# EAGLE board motorshieldv10_jd (EAGLE 5.06)
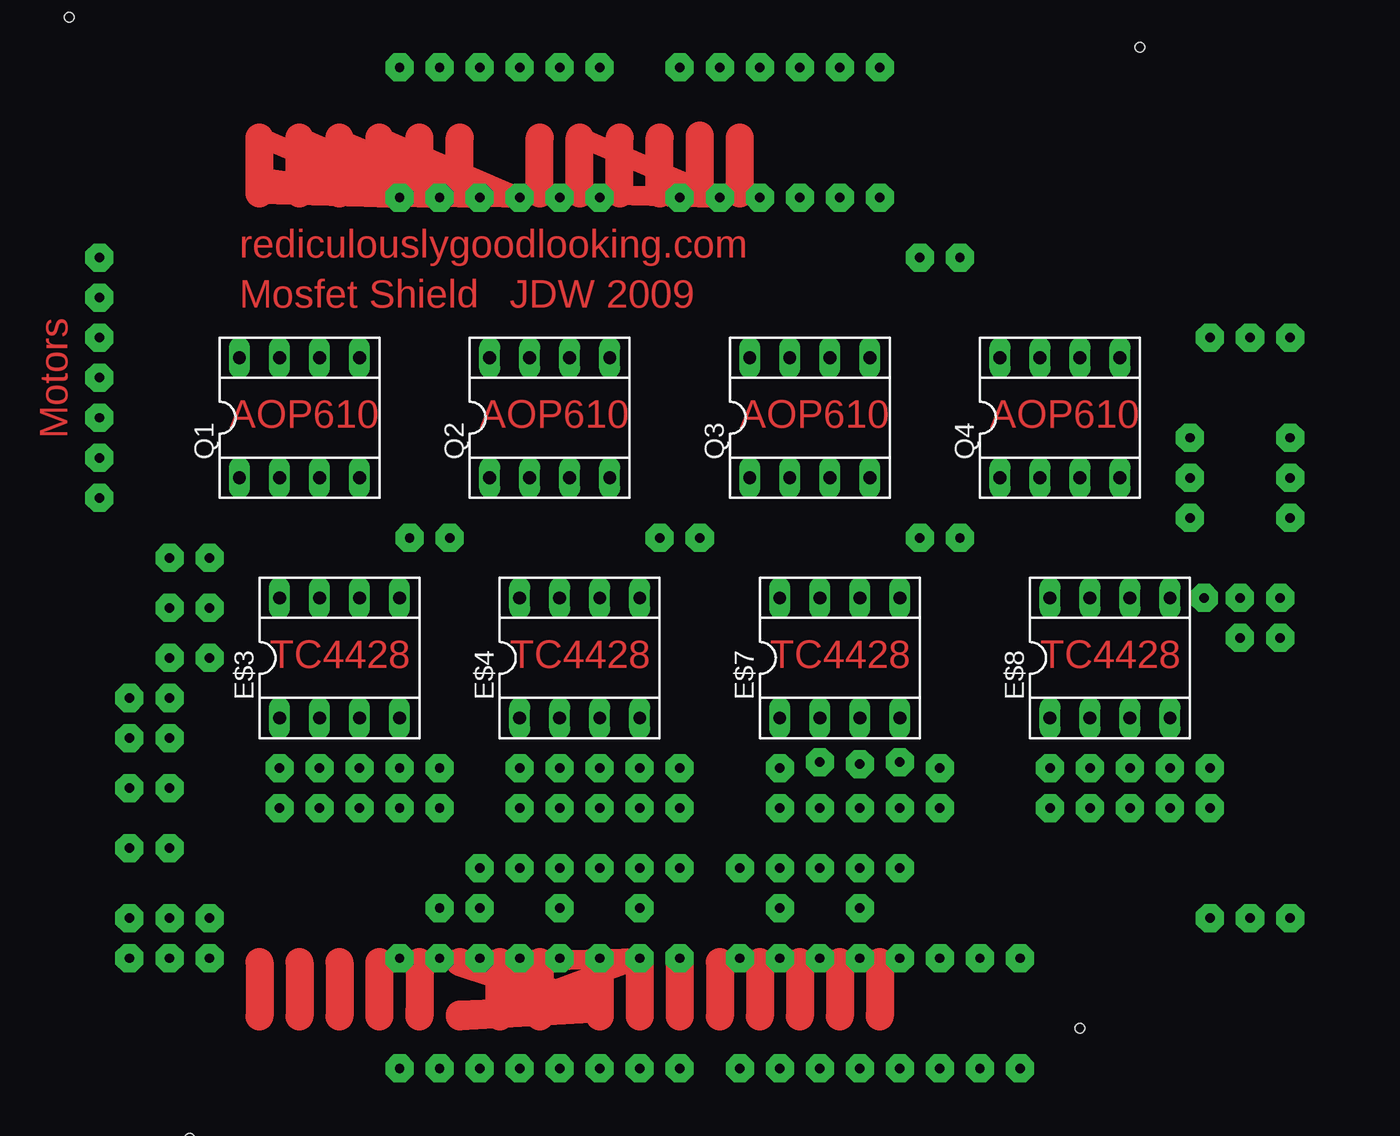
[diagram p0: board, top side]
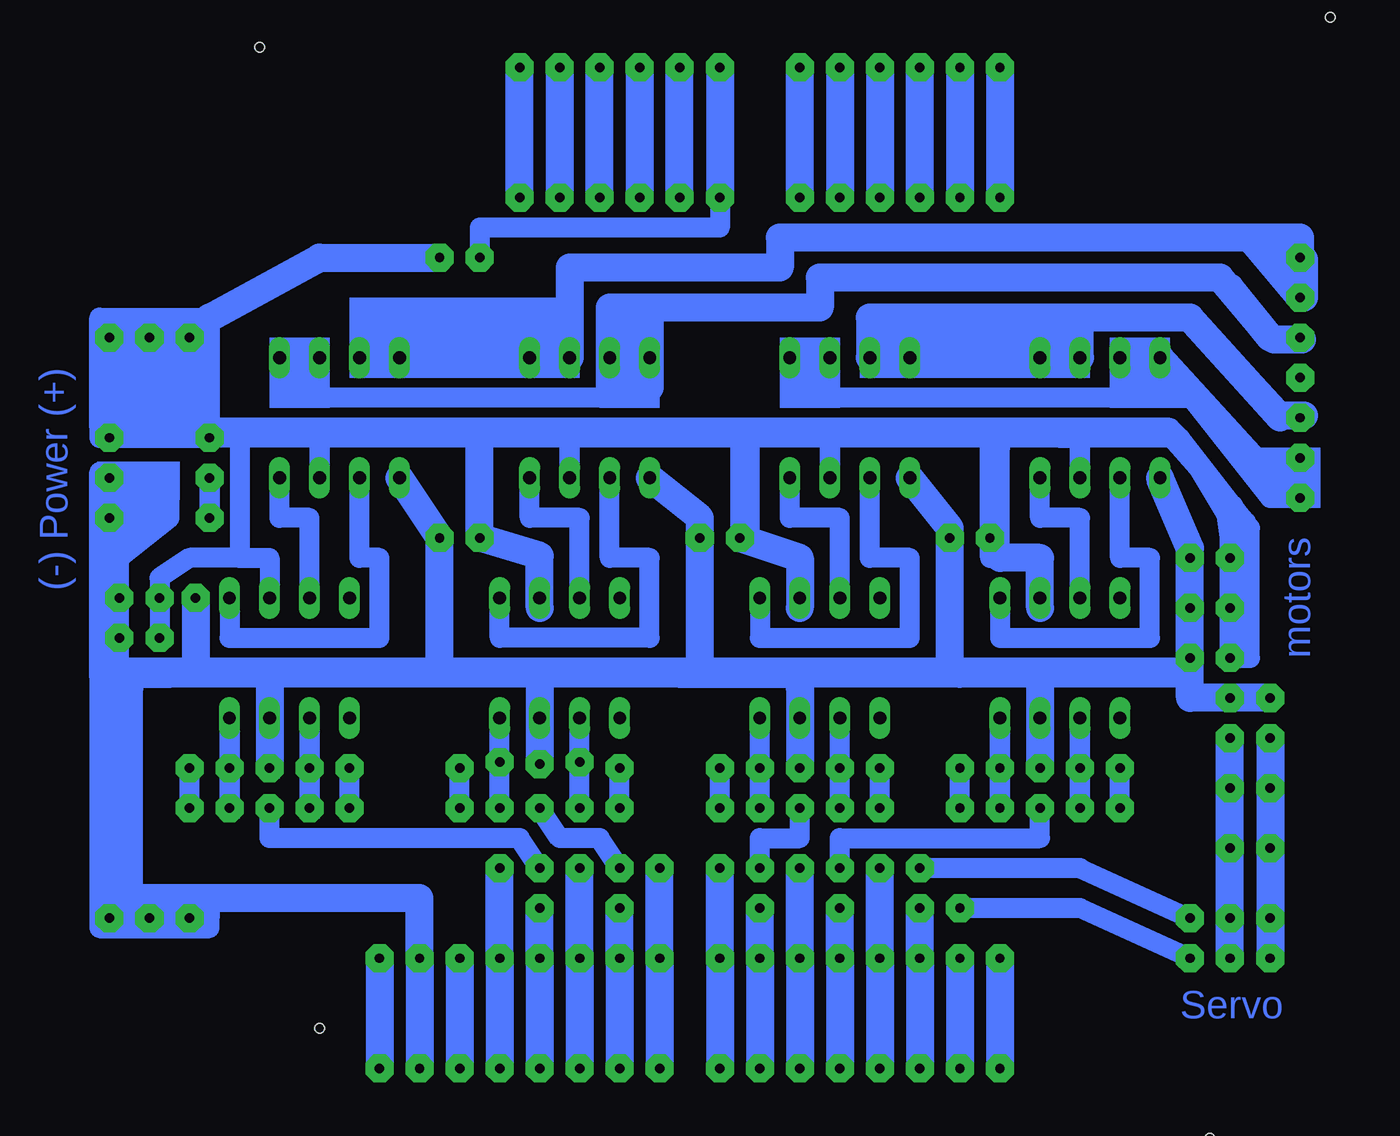
[diagram p1: board, bottom side, seen from below]

No outline drawn. Coordinates in mm, seen from the top.
Copper layers (1*16): Top 0.035mm / dielectric 1.5mm / Bottom 0.035mm
Design rules "default": minimum track width 10mil, minimum drill 24mil, track to track 8mil, track to pad 8mil, pad to pad 8mil, via to via 8mil, smd to smd 8mil, copper to edge 40mil, drill to drill 8mil, minimum pad ring 10mil, minimum via ring 8mil, stop-mask expansion 4mil, vias tented up to drill 0mil, thermal gap 10mil
Holes 0.6 mm at -1.91,59.05 5.71,-12.06 62.23,-5.08 66.04,57.15 -36.2,-14.61

## Footprints (pad centres in the part's own frame; a part is rotated, then mirrored left to right if it is on the bottom)
SOCKET-08 = drill 0.813 long: 1 -3.81,-3.81; 2 -1.27,-3.81; 3 1.27,-3.81; 4 3.81,-3.81; 5 3.81,3.81; 6 1.27,3.81; 7 -1.27,3.81; 8 -3.81,3.81

## Placement (x,y rotation side)
E$3  TC4427  [SOCKET-08]  15.24,18.41 0 top
E$4  TC4427  [SOCKET-08]  30.48,18.41 0 top
E$7  TC4427  [SOCKET-08]  46.99,18.41 0 top
E$8  TC4427  [SOCKET-08]  64.14,18.41 0 top
Q1  AOP610  [SOCKET-08]  12.7,33.66 0 top
Q2  AOP610  [SOCKET-08]  28.57,33.66 0 top
Q3  AOP610  [SOCKET-08]  45.09,33.66 0 top
Q4  AOP610  [SOCKET-08]  60.96,33.66 0 top

## Library data of the parts
E$3 E$4 E$7 E$8 Q1-Q4 = ic-package

## Nets
GND: E$3.3 E$4.3 E$7.3 E$8.3 Q1.1 Q2.1 Q3.1 Q4.1
S$1: E$3.5 Q1.2
S$3: E$3.7 Q1.4
S$6: E$4.7 Q2.4
S$7: E$4.5 Q2.2
S$15: E$3.4
S$18: E$7.5 Q3.2
S$22: E$7.7 Q3.4
S$23: E$8.7 Q4.4
S$28: E$8.5 Q4.2
S$29: E$4.2
S$31: E$4.4
S$32: E$7.2
S$34: E$7.4
S$35: E$8.2
S$41: E$8.4
S$49: Q3.6
S$59: Q1.8
S$63: Q1.3 Q2.3 Q3.3
S$72: E$7.6
VCC: Q4.3

## Tracks (layer width: path | path; a pad name or v marks a point on that pad's centre or on a via)
GND  (via drill 0.6 pad 1.78)
  Bottom 0.406: 48.26,12.06 E$7.3 48.26,17.14 | v31.75,11.43 E$4.3 31.75,16.51 | v65.41,11.43 E$8.3 65.41,17.14 | 22.23,26.67 22.23,27.3 | v16.51,11.43 E$3.3 16.51,17.14
  Bottom 0.813: v48.26,11.68 48.26,12.06 48.26,11.43 | 48.26,16.51 48.26,17.14 54.61,17.78 65.41,17.14 71.75,17.14 | 38.1,17.78 39.37,17.14 | 31.75,17.14 31.75,16.51
  Bottom 1.27: 70.48,2.54 v70.48,1.91 69.22,1.27 | 73.66,1.91 71.75,2.54 71.75,3.17 | v73.03,1.91 72.39,1.27 75.56,1.27 74.93,16.51 74.3,16.51 | 69.22,1.91 69.22,2.54 | 69.22,1.27 69.22,1.91 | 69.22,3.17 69.22,1.91 | 71.75,3.17 71.75,1.91 | 71.75,3.17 71.12,3.17 | 75.56,24.51 75.31,26.54 76.2,26.29 | 69.22,1.27 76.2,1.27 76.2,4.45 | 76.2,4.45 76.2,1.91 v75.56,1.91 75.56,3.17 75.56,17.14 | 76.2,26.29 76.2,26.67 | 76.2,26.29 76.2,30.23 | 74.3,3.17 74.3,1.91 | 76.2,17.78 76.2,26.29 | 76.2,17.78 76.2,4.45 | 76.2,17.78 76.2,17.14 75.56,17.14 | 71.75,29.84 71.75,27.3 74.93,24.77 v74.93,22.23 v74.93,19.68 74.93,17.78 | 75.56,17.14 76.2,17.78 | 71.75,17.14 75.56,17.14 | 71.75,17.14 48.26,17.14 39.37,17.14 31.75,17.14 21.59,17.14 | 71.75,17.14 74.93,17.14 74.93,17.78 | 22.23,17.78 21.59,17.14 | 21.59,17.14 16.51,17.14 6.99,17.14 6.99,15.88 6.99,17.78 | Q1.1 6.99,26.04 6.99,25.4 | 6.99,17.78 v6.99,18.41 v6.99,21.59 v6.99,24.77 | 6.99,17.78 22.23,17.78 | 22.23,17.78 38.1,17.78 54.61,17.78 74.93,17.78
  Bottom 1.778: 69.22,3.17 71.75,3.17 74.3,3.17 | 74.3,3.17 74.3,16.51 | Q4.1 v54.61,26.04 54.61,17.78 | Q3.1 38.1,27.3 v38.1,26.04 38.1,17.78 | 48.26,17.14 48.26,12.06 | 75.56,3.17 74.3,3.17 | 65.41,17.14 v65.41,11.43 | 31.75,16.51 v31.75,11.43 | Q2.1 22.23,26.67 v22.23,26.04 22.23,17.78 | 16.51,17.14 v16.51,11.43 | Q1.1 6.99,25.4 v6.99,24.77 v6.99,21.59 v6.99,18.41 6.99,15.88 v4.45,15.88 v1.91,15.88
S$1
  Bottom 1.27: E$3.5 19.05,19.68 9.53,19.68 9.53,24.77 11.43,24.77 Q1.2
S$2  (via drill 0.6 pad 1.78)
  other vias: 6.99,1.91
S$3
  Bottom 1.27: E$3.7 13.97,27.3 16.51,27.3 Q1.4
S$4  (via drill 0.6 pad 1.78)
  Bottom 1.778: v43.18,2.54 v43.18,-0.64 v43.18,-7.62
S$5  (via drill 0.6 pad 1.78)
  Bottom 1.27: v21.59,2.54 13.97,2.54 v6.99,-0.64
S$6
  Bottom 1.27: Q2.4 32.38,27.3 29.21,27.3 E$4.7
S$7
  Bottom 1.27: E$4.5 34.29,19.68 24.77,19.68 24.77,24.77 27.3,24.77 Q2.2
S$8  (via drill 0.6 pad 1.78)
  Bottom 1.778: v29.21,2.54 v29.21,-0.64 v29.21,-7.62
S$9  (via drill 0.6 pad 1.78)
  Bottom 1.778: v26.67,5.08 v26.67,-0.64 v26.67,-7.62
S$10  (via drill 0.6 pad 1.78)
  Bottom 1.778: v48.26,2.54 v48.26,-0.64 v48.26,-7.62
S$11  (via drill 0.6 pad 1.78)
  other vias: 73.03,38.73
S$12  (via drill 0.6 pad 1.78)
  Bottom 0.61: v48.26,5.08 48.26,5.21
  Bottom 1.27: v48.26,5.08 49.53,6.99 65.41,6.99 v65.41,8.89
S$13  (via drill 0.6 pad 1.78)
  other vias: 13.97,8.89
S$14  (via drill 0.6 pad 1.78)
  Bottom 1.27: v29.21,5.08 29.21,6.99 16.51,6.99 v16.51,8.89
S$15  (via drill 0.6 pad 1.78)
  Bottom 0.406: v19.05,8.89 v19.05,11.43 E$3.4
  Bottom 1.27: v19.05,8.89 v19.05,11.43 19.05,15.24
S$16
  Bottom 1.27: 42.55,34.92 62.87,34.92
S$17  (via drill 0.6 pad 1.78)
  other vias: 4.45,21.59
S$18
  Bottom 1.27: E$7.5 50.8,19.68 41.27,19.68 41.27,24.77 43.81,24.77 Q3.2
S$19
  Bottom 1.27: 11.43,34.92 30.48,34.92
S$20  (via drill 0.6 pad 1.78)
  Bottom 1.27: v24.13,5.08 13.97,5.08 6.99,1.91
S$21  (via drill 0.6 pad 1.78)
  other vias: 0,36.2
S$22
  Bottom 0.406: Q3.4 48.9,27.94
  Bottom 1.27: E$7.7 45.72,27.3 48.9,27.3 Q3.4
S$23
  Bottom 0.406: Q4.4 64.77,27.94
  Bottom 1.27: E$8.7 62.87,27.3 64.77,27.3 Q4.4
S$24  (via drill 0.6 pad 1.78)
  Bottom 0.813: 1.27,33.66 v0,33.66
  Bottom 1.27: 6.99,40.01 13.34,40.01
  Bottom 1.778: 1.27,33.66 6.99,40.01 27.3,40.01 27.3,37.47 13.97,37.47 13.97,39.37
S$25  (via drill 0.6 pad 1.78)
  Bottom 1.778: v4.45,-0.64 v4.45,13.34
S$26  (via drill 0.6 pad 1.78)
  Bottom 1.778: v44.45,47.62 v44.45,55.88
S$27  (via drill 0.6 pad 1.78)
  Top 1.27: v19.05,47.62 10.16,48.9 | v19.05,47.62 10.16,47.88 10.16,47.62 | v19.05,47.62 10.16,51.44
  Top 1.778: 10.16,47.88 10.16,51.44
  Bottom 1.778: v19.05,55.88 v19.05,47.62
S$28
  Bottom 1.27: E$8.5 67.94,19.68 58.42,19.68 58.42,24.77 59.69,24.77 Q4.2
S$29  (via drill 0.6 pad 1.78)
  Bottom 0.406: v29.21,8.89 v29.21,11.43 E$4.2
  Bottom 1.27: v29.21,8.89 v29.21,11.43 29.21,15.24
S$30  (via drill 0.6 pad 1.78)
  Bottom 1.778: v21.59,-0.64 v21.59,-7.62
S$31  (via drill 0.6 pad 1.78)
  Bottom 0.406: v34.29,8.89 v34.29,11.43 E$4.4
  Bottom 1.27: v34.29,8.89 v34.29,11.43 34.29,15.24
S$32  (via drill 0.6 pad 1.78)
  Bottom 0.406: v45.72,8.89 v45.72,11.81
  Bottom 0.813: v45.72,11.81 E$7.2
  Bottom 1.27: v45.72,8.89 v45.72,11.81 45.72,15.24
S$33  (via drill 0.6 pad 1.78)
  Bottom 1.778: v24.13,2.54 v24.13,-0.64 v24.13,-7.62
S$34  (via drill 0.6 pad 1.78)
  Bottom 0.406: v50.8,8.89 v50.8,11.81
  Bottom 0.813: v50.8,8.89 v50.8,11.81 E$7.4
  Bottom 1.27: v50.8,8.89 v50.8,11.81 50.8,15.24
S$35  (via drill 0.6 pad 1.78)
  Bottom 0.813: v62.87,8.89 v62.87,11.43 E$8.2
S$36  (via drill 0.6 pad 1.78)
  Bottom 1.778: v19.05,-0.64 v19.05,-7.62
S$37  (via drill 0.6 pad 1.78)
  Bottom 0.813: v69.22,27.3 v69.22,29.84
S$38  (via drill 0.6 pad 1.78)
  Bottom 1.778: v31.75,47.62 v31.75,55.88
S$39  (via drill 0.6 pad 1.78)
  other vias: 4.45,1.91
S$40
  Bottom 1.778: -0.25,41.27 -0.25,43.69
S$41  (via drill 0.6 pad 1.78)
  Bottom 0.813: v67.94,8.89 v67.94,11.43 E$8.4
S$42  (via drill 0.6 pad 1.78)
  Bottom 1.778: v70.1,22.23 70.1,18.29
S$43  (via drill 0.6 pad 1.78)
  Bottom 0.813: v0,38.73 1.91,38.73
  Bottom 1.778: 4.45,41.91 1.91,38.73 5.08,42.55 30.48,42.55 30.48,40.64 41.27,40.64 | 41.27,40.64 43.81,40.64 43.81,38.73 | 43.81,38.73 43.81,37.47 | 43.81,37.47 43.81,36.2 41.27,36.2 41.27,39.37 42.55,39.37 | 43.81,37.47 43.18,36.83 | 43.81,38.73 43.81,35.56 | 41.27,40.64 41.27,35.56
S$44  (via drill 0.6 pad 1.78)
  Bottom 1.27: 19.68,31.75 v19.68,26.04 19.68,24.77 19.05,24.77 19.05,31.75
  Bottom 1.778: 19.05,24.77 16.51,24.77 16.51,21.59
S$45
  Bottom 1.778: 3.81,23.5 4.45,27.94
S$46  (via drill 0.6 pad 1.78)
  other vias: 4.45,24.77
S$47  (via drill 0.6 pad 1.78)
  other vias: 75.56,38.73
S$48  (via drill 0.6 pad 1.78)
  other vias: 0,28.57
S$49  (via drill 0.6 pad 1.78)
  Bottom 0.406: 46.35,38.1 46.35,38.73
  Bottom 0.813: Q3.6 46.35,38.1
  Bottom 1.27: 46.35,36.83 Q3.6 46.35,38.73
  Bottom 1.778: Q3.6 46.35,43.18 33.02,43.18 33.02,45.09 3.17,45.09 | v0,41.27 v0,43.81 | v0,41.27 0,45.09 3.17,45.09 | 3.17,45.09 v0,41.27 | v0,41.27 1.27,43.81
S$50  (via drill 0.6 pad 1.78)
  Top 1.27: 30.48,51.44 v39.37,47.62 30.48,47.88 30.48,47.62
  Top 1.778: 30.48,47.88 30.48,51.44
  Bottom 1.778: v39.37,47.62 v39.37,55.88
S$51  (via drill 0.6 pad 1.78)
  other vias: 4.45,10.16
S$53  (via drill 0.6 pad 1.78)
  Bottom 1.778: v58.42,-0.64 v58.42,-7.62
S$54  (via drill 0.6 pad 1.78)
  other vias: 1.91,1.91
S$55  (via drill 0.6 pad 1.78)
  Top 1.27: v24.13,47.62 15.24,48.9 | v24.13,47.62 15.24,47.88 15.24,47.62 | v24.13,47.62 15.24,51.31
  Top 1.778: 15.24,47.88 15.24,51.31 15.24,51.44
  Bottom 1.778: v24.13,47.62 v24.13,55.88
S$56  (via drill 0.6 pad 1.78)
  other vias: 1.91,6.35
S$57  (via drill 0.6 pad 1.78)
  other vias: 4.45,6.35
S$58  (via drill 0.6 pad 1.78)
  Bottom 1.778: v53.34,-0.64 v53.34,-7.62
S$59
  Bottom 1.27: 1.91,29.84 2.54,31.11 1.27,31.11 1.27,28.57 Q1.8 1.91,28.57
  Bottom 1.778: 2.54,30.48 Q1.8
S$60  (via drill 0.6 pad 1.78)
  Top 1.27: 25.4,-4.45 25.4,-4.32 25.4,-4.19 | 25.4,-0.64 25.4,-0.89 v34.29,-0.64 | 25.4,-3.94 v34.29,-0.64 | 34.29,-1.91 v34.29,-0.64 | 34.29,-4.32 34.29,-4.45
  Top 1.778: 25.4,-3.94 25.4,-0.89 | 25.4,-3.94 25.4,-4.19 | 25.4,-3.94 25.4,-4.32 | 34.29,-0.89 v34.29,-0.64 34.29,-4.32
  Bottom 1.778: v34.29,2.54 v34.29,-0.64 v34.29,-7.62
S$61  (via drill 0.6 pad 1.78)
  other vias: 1.91,10.16
S$62  (via drill 0.6 pad 1.78)
  Bottom 1.778: v49.53,47.62 v49.53,55.88
S$63  (via drill 0.6 pad 1.78)
  Bottom 0.813: 46.35,32.38 52.07,32.38 | 46.35,32.38 Q3.3 | Q2.3 29.84,32.38 35.56,32.38 46.35,32.38 | 13.97,32.38 Q1.3 | 19.68,32.38 19.05,32.38 15.24,32.38
  Bottom 1.27: 69.22,40.01 76.2,40.01 76.2,39.37 | v72.39,19.68 v72.39,22.23 72.39,23.5 70.48,24.77 67.31,24.77 | 65.41,21.59 65.41,24.77 67.31,24.77 | 67.31,32.38 67.31,24.77 | 67.31,32.38 v69.22,32.38 v75.56,32.38 76.2,32.38 76.2,33.02 | 13.97,29.21 13.97,32.38 15.24,32.38 | 35.56,32.38 v35.56,26.04 | 35.56,32.38 67.31,32.38 | 19.05,32.38 35.56,32.38 | 76.2,33.02 8.26,33.02 7.62,32.38 | 15.24,32.38 35.56,32.38 | 7.62,32.38 15.24,32.38 | 7.62,32.38 3.81,26.04 | 7.62,32.38 3.17,26.67 3.17,18.41 v4.45,18.41 | 69.22,39.37 v70.48,38.73 | 69.22,39.37 69.22,33.66 | 76.2,39.37 69.22,39.37 | 76.2,33.02 76.2,39.37
  Bottom 1.778: v54.61,43.81 62.23,43.81 69.22,40.01 | 31.75,21.59 31.75,24.77 v35.56,26.04
S$64  (via drill 0.6 pad 1.78)
  Top 1.27: v21.59,47.62 12.7,48.9 | v21.59,47.62 12.7,47.88 12.7,47.62 | v21.59,47.62 12.7,51.44
  Top 1.778: 12.7,47.88 12.7,51.44
  Bottom 1.778: v21.59,55.88 v21.59,47.62
S$65  (via drill 0.6 pad 1.78)
  Bottom 1.778: v1.91,13.34 v1.91,-0.64
S$66  (via drill 0.6 pad 1.78)
  other vias: 0,31.11
S$67  (via drill 0.6 pad 1.78)
  Top 1.27: 17.78,47.62 17.78,47.88 v26.67,47.62 17.78,51.44
  Top 1.778: 17.78,47.88 17.78,51.44
  Bottom 1.778: v26.67,55.88 v26.67,47.62
S$68  (via drill 0.6 pad 1.78)
  Bottom 1.778: v29.21,55.88 v29.21,47.62
S$70  (via drill 0.6 pad 1.78)
  Bottom 1.27: v21.59,8.89 v21.59,11.43
S$72
  Bottom 0.813: E$7.6 48.26,24.77
S$73
  Bottom 0.406: 41.78,37.08 41.66,37.08
S$74  (via drill 0.6 pad 1.78)
  Bottom 1.27: v36.83,47.62 36.83,45.72 52.07,45.72 v52.07,43.81
  Bottom 1.778: v36.83,55.88 v36.83,47.62
S$76  (via drill 0.6 pad 1.78)
  Bottom 1.778: v41.91,55.88 v41.91,47.62
S$81
  Bottom 1.27: 1.65,38.61 4.57,41.91
  Bottom 1.778: -0.13,38.61 1.65,38.61
S$82
  Bottom 1.27: 1.02,33.78 6.6,39.88
  Bottom 1.778: -0.25,33.78 1.02,33.78
S$83  (via drill 0.6 pad 1.78)
  Bottom 1.778: v46.99,55.88 v46.99,47.62
S$85  (via drill 0.6 pad 1.78)
  Bottom 1.27: v11.43,8.89 v11.43,11.43
S$86  (via drill 0.6 pad 1.78)
  Bottom 1.27: v26.67,8.89 v26.67,11.43
S$87  (via drill 0.6 pad 1.78)
  Bottom 1.778: 48.26,21.59 48.26,24.89 v52.07,26.04 52.07,32.26
S$88  (via drill 0.6 pad 1.78)
  Bottom 1.27: v36.83,8.89 36.83,11.43
S$91  (via drill 0.6 pad 1.78)
  Bottom 1.27: v43.18,8.89 v43.18,11.43
S$93  (via drill 0.6 pad 1.78)
  Bottom 1.27: v53.34,8.89 v53.34,11.43
S$95  (via drill 0.6 pad 1.78)
  Bottom 1.27: v60.33,8.89 v60.33,11.43
S$97  (via drill 0.6 pad 1.78)
  Bottom 1.27: v70.48,8.89 v70.48,11.43
S$103  (via drill 0.6 pad 1.78)
  Bottom 1.778: v50.8,5.08 v50.8,-0.64 v50.8,-7.62
S$106
  Bottom 1.27: 8,32.38 8.13,32.38 3.43,27.05
S$111
  Top 1.27: 20.32,48.9 20.32,48.26 | 20.32,48.26 20.32,47.88 20.32,47.62 | 20.32,51.44 20.32,48.26
  Top 1.778: 20.32,47.88 20.32,51.44
S$112  (via drill 0.6 pad 1.78)
  Bottom 1.27: v34.29,5.08 34.29,6.99 31.75,6.99 v31.75,8.89
S$113  (via drill 0.6 pad 1.78)
  Bottom 0.813: v75.56,27.3 v75.56,29.84
  Bottom 1.27: 73.66,27.94 74.3,26.67 74.3,25.4 72.39,27.94 73.66,28.57 v75.56,27.3 | 74.3,27.3 v75.56,27.3 | v75.56,27.3 76.2,27.3 | 74.3,29.84 v75.56,29.84 76.2,29.84 76.2,27.3 | 74.93,25.4 76.2,27.3
S$114
  Top 1.27: 22.86,47.88 22.86,47.62
  Top 1.778: 22.86,47.88 22.86,51.44
S$115
  Top 1.27: 27.94,48.9 27.94,48.26 | 27.94,48.26 27.94,47.88 27.94,47.62 | 27.94,51.44 27.94,48.26
  Top 1.778: 27.94,47.88 27.94,51.44
S$116
  Top 1.27: 33.02,48.9 33.02,48.26 | 33.02,48.26 33.02,47.88 33.02,47.62 | 33.02,51.44 33.02,48.26
  Top 1.778: 33.02,47.88 33.02,51.44
S$117
  Top 1.27: 35.56,47.62 35.56,47.88
  Top 1.778: 35.56,47.88 35.56,51.44
S$118
  Top 1.27: 38.1,48.9 38.1,48.26 | 38.1,48.26 38.1,47.88 38.1,47.62 | 38.1,48.26 38.1,51.44
  Top 1.778: 38.1,47.88 38.1,51.56
S$119
  Top 1.27: 40.64,47.88 40.64,47.62
  Top 1.778: 40.64,47.88 40.64,51.44
S$120
  Top 1.27: 10.16,-0.64 10.16,-0.89 | 10.16,-4.32 10.16,-4.45
  Top 1.778: 10.16,-0.89 10.16,-4.32
S$121
  Top 1.27: 12.7,-0.64 12.7,-0.89 12.7,-1.27 | 12.7,-1.27 12.7,-1.91 | 12.7,-1.27 12.7,-4.32 12.7,-4.45
  Top 1.778: 12.7,-0.89 12.7,-4.32
S$122
  Top 1.27: 15.24,-0.64 15.24,-0.89 | 15.24,-4.32 15.24,-4.45
  Top 1.778: 15.24,-0.89 15.24,-4.32
S$123
  Top 1.27: 17.78,-0.64 17.78,-0.89 | 17.78,-4.32 17.78,-4.45
  Top 1.778: 17.78,-4.32 17.78,-0.89
S$124
  Top 1.27: 20.32,-0.64 20.32,-0.89 | 20.32,-4.19 20.32,-4.32 20.32,-4.45
  Top 1.778: 20.32,-0.89 20.32,-3.94 | 20.32,-3.94 20.32,-4.19 | 20.32,-3.94 20.32,-4.32
S$125  (via drill 0.6 pad 1.78)
  Bottom 1.778: 75.56,3.17 55.88,3.17 v55.88,-0.64 v55.88,-7.62
S$126
  Top 1.27: 27.94,-1.91 27.94,-1.27 | 27.94,-1.27 27.94,-1.02 | 27.94,-0.89 27.94,-0.64 | 27.94,-1.27 27.94,-3.94 | 27.94,-4.32 27.94,-4.45
  Top 1.778: 27.94,-1.02 27.94,-0.89 27.94,-3.94 27.94,-4.32
S$127  (via drill 0.6 pad 1.78)
  Top 1.27: 31.75,-4.32 31.75,-4.45
  Top 1.778: 31.75,-0.89 v31.75,-0.64 31.75,-4.32
  Bottom 1.778: v31.75,5.08 v31.75,-0.64 v31.75,-7.62
S$129  (via drill 0.6 pad 1.78)
  Top 1.27: 36.83,-1.91 v36.83,-0.64 | 36.83,-4.19 36.83,-4.32 36.83,-4.45
  Top 1.778: 36.83,-0.89 v36.83,-0.64 36.83,-4.06 | 36.83,-4.06 36.83,-4.19 | 36.83,-4.06 36.83,-4.32
  Bottom 1.778: v36.83,5.08 v36.83,-0.64 v36.83,-7.62
S$130
  Top 1.27: 39.37,-0.64 39.37,-0.89 | 39.37,-4.32 39.37,-4.45
  Top 1.778: 39.37,-0.89 39.37,-4.32
S$131
  Top 1.27: 41.91,-0.64 41.91,-0.89 | 41.91,-1.02 41.91,-4.32 41.91,-4.45
  Top 1.778: 41.91,-1.02 41.91,-0.89 41.91,-4.32
S$132
  Top 1.27: 44.45,-0.64 44.45,-0.89 | 44.45,-4.32 44.45,-4.45
  Top 1.778: 44.45,-0.89 44.45,-4.32
S$133
  Top 1.27: 46.99,-0.64 46.99,-0.89 | 46.99,-4.32 46.99,-4.45
  Top 1.778: 46.99,-0.89 46.99,-4.32
S$134
  Top 1.27: 49.53,-0.64 49.53,-0.89 | 49.53,-1.27 49.53,-4.19 | 49.53,-4.32 49.53,-4.45
  Top 1.778: 49.53,-1.27 49.53,-0.89 49.53,-4.19 49.53,-4.32
S$159  (via drill 0.6 pad 1.78)
  Bottom 1.778: v45.72,5.08 v45.72,-0.64 v45.72,-7.62
S$161  (via drill 0.6 pad 1.78)
  Bottom 1.778: v40.64,5.08 v40.64,-0.64 v40.64,-7.62
S$169
  Top 1.27: 22.86,-0.89 22.86,-0.64 | 22.86,-4.19 22.86,-4.32 22.86,-4.45
  Top 1.778: 31.75,-3.81 22.86,-0.89 | 22.86,-4.19 31.75,-3.81 | 22.86,-4.32 31.75,-3.81
S$204
  Bottom 1.27: 34.92,26.04 34.92,31.75
S$209  (via drill 0.6 pad 1.78)
  Bottom 1.27: v43.18,5.08 44.45,6.99 46.99,6.99 v48.26,8.89
S$210  (via drill 0.6 pad 1.78)
  other vias: 36.83,11.43
S$211  (via drill 0.6 pad 1.78)
  other vias: 13.97,11.43
VCC
  Bottom 0.813: Q4.3 62.23,32.38
(copper drawn outside any net)
  shapes: Bottom area x36

## Text on the board
Top: rediculouslygoodlooking.com | Mosfet Shield | JDW 2009 | Motors | AOP610 | AOP610 | AOP610 | AOP610 | TC4428 | TC4428 | TC4428 | TC4428
Bottom: (-) Power (+) | motors | Servo